# Altium PCB PCB2.PcbDoc (part 2 of 2)
Units mil, origin at the board's own origin, x right, y up, seen from the top; angles counter-clockwise.
Board outline 3937.01 x 3937.01 mil, 2 copper layers (Top Layer, Bottom Layer); 157 components, 107 nets, 472 pads, 34 vias.
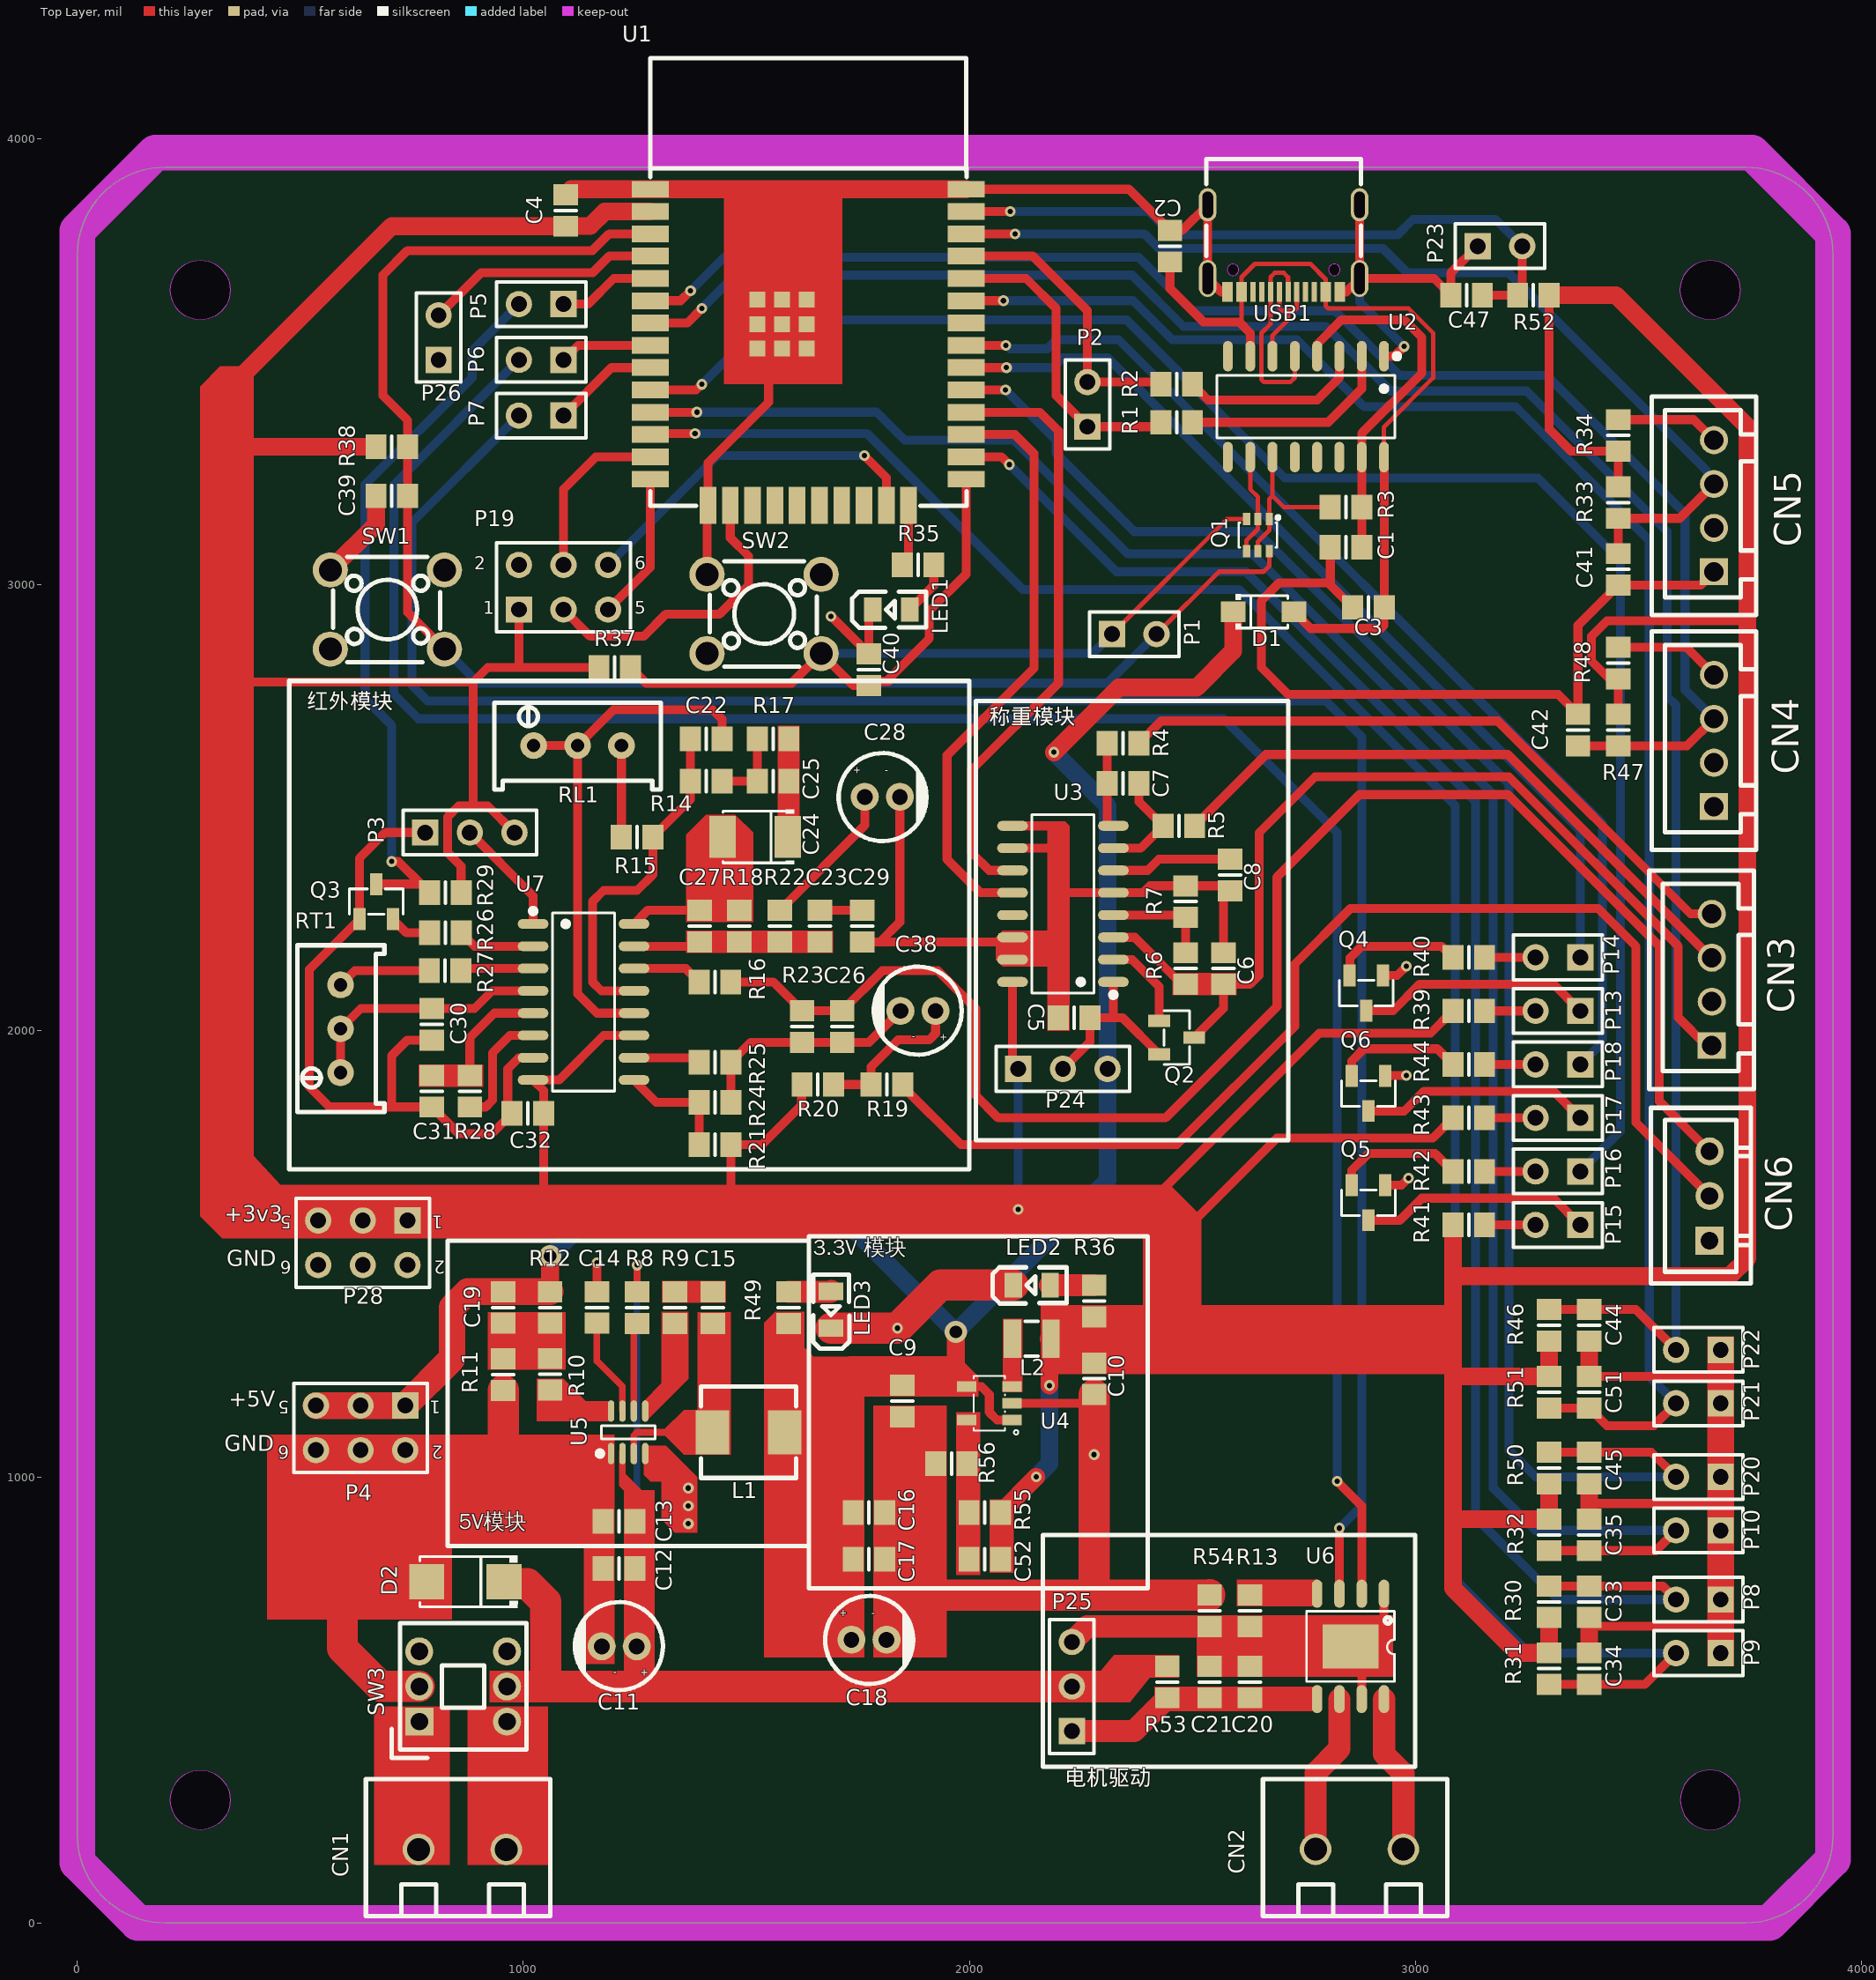
[diagram p0: Top Layer view]

## Via types
v1: diameter 24, hole 12, Top Layer to Bottom Layer, 32 vias
v2: diameter 50, hole 28, Top Layer to Bottom Layer, 2 vias

## Nets (pads, with @x,y where several pads share a name; then routed paths per layer and width w, separated by ;. In a path a pad name is that pad's centre, name@x,y a point inside that pad or via, vN(x,y) a via of type N, cw(c..) or ccw(c..) an arc to the next point about the centre after c; other vN are vias at no path point) (continued)
VBUS: C2.1 C3.1 D1.2 U2.7 U2.16 USB1.A4B9 USB1.B4A9 | length 1898.1
  Top Layer w10: 2605,3590 2610.51,3595.51 USB1.B4A9 2610.51,3690.51 2640,3720 2765,3720 2799.49,3685.51 USB1.A4B9 2799.49,3625.52 2805,3620 2985.36,3620 3040,3565.36 3040,3464.64 2930,3354.64 U2.16
  Top Layer w20: C2.1 2450,3665 2525,3590 2605,3590 2630,3565 U2.7 ; D1.2 2765.87,2902.44 2922.44,2902.44 2930,2910 C3.1@2930,2950 ; U2.16 2930.43,3286.48 C3.1
VCC: C14.2 U5.7 | length 220.6
  Top Layer w15: C14.2 1165,1260 1222.2,1202.8 U5.7
pads on no net: SW1.2 SW1.3 SW2.2 SW2.3 SW3.3 SW3.6 U1.17 U1.18 U1.19 U1.20 U1.21 U1.22 U1.32 U2.8 U2.9 U2.12 U2.13 U2.14 U3.13 USB1.A5 USB1.A8 USB1.B5 USB1.B8

## Polygon pours and split planes (outlines as drawn)
GND on Bottom Layer "GND_L02_P000" (solid, remove dead copper, pour order 0): 5,3940 15,3930 3945,3930 3945,10 3935,0 0,0

## Keep-outs
Keep-Out Layer:
  lines w80: 0,135 0,3795 175,3970 3755,3970 3937.01,3787.99 3937.01,142.01 3795,0 135,0 0,135

## Other copper
Top Layer:
  rectangle net GND: 1450,3450 1715,3890
  rectangle net E+: 2455,2080 2600,2130
  rectangle net +3V3: 2160,1230 3085,1385
  rectangle net GND: 3655,575 3715,1315
  rectangle net +3V3: 275,1585 395,3355
  rectangle net NetC24_1: 1570,2390 1620,2685
  rectangle net NetC23_1: 1365,2175 1695,2225
  rectangle net NetC31_1: 765,1875 910,1925
  rectangle net +5: 1540,595 1765,1270
  rectangle net +3V3: 325,1535 2430,1655
  rectangle net +3V3: 2045,785 2100,950
  rectangle net NetL2_1: 2075,1190 2120,1355
  rectangle net NetR13_1: 2600,710 2780,770
  rectangle net NetC20_1: 2415,475 2790,530
  rectangle net NetC20_2: 2510,552.05 2950,690
  rectangle net NetC52_2: 1970,780 2025,1145
  rectangle net GND: 1785,595 1950,1160
  rectangle net NetC15_2: 1310,1390 1455,1440
  rectangle net NetC15_1: 1390,1050 1465,1370
  rectangle net +12: 1225,495 1295,970
  rectangle net GND: 1135,580 1205,895
  rectangle net NetC19_1: 920,1240 1095,1370
  rectangle net GND: 425,680 840,860
  rectangle net GND: 425,845 1205,1095
  rectangle net NetCN1_2: 875,130 1055,485
  rectangle net NetCN1_1: 665,130 835,485
  region net GND: 2075,2225 2060,2210 2060,2160 2075,2145 2211.88,2145 2211.88,2225
  region net GND: 2175,2470 2215,2470 2225,2460 2225,2000 2175,2000
  region net +3V3: 395,3330 275,3330 275,3445 320,3490 395,3490
  region net +3V3: 275,1585 325,1535 335,1535 455,1655 395,1720
  region net NetC24_2: 1365,2245 1515,2245 1515,2445 1475,2485 1410,2485 1365,2440
  region net +3V3: 2390,1655 2450,1655 2520,1585 2520,1355 2390,1355
  region net NetC15_1: 1425,1050 1425,1150 1360,1150 1315,1105 1315,1095 1360,1050
  region net +12: 2295,565 2295,495 2360,495 2405,550.27 2470,550.27 2470,600 2325,600 2320,595
  region net +5: 1730,1270 1975,1270 2020,1225 2020,1180 1730,1180
  region net +5: 1540,1200 1540,1345 1565,1370 1630,1370 1630,1290 1660,1260 1660,1200
  region net GND: 1310,1070 1320,1070 1390,1000 1390,875 1340,875 1310,905
  region net GND: 1270,1070 1270,1005 1285,990 1320,990 1320,1070
  region net NetR9_1: 1310,1370 1370,1370 1370,1220 1275,1125 1270,1130 1270,1170 1310,1210
  region net NetR10_1: 1030,1220 1030,1125 1200,1125 1200,1170 1140,1170 1090,1220
  region net +12: 1215,1060 1215,980 1230,965 1270,965 1228.87,1006.13 1228.87,1060
  region net +12: 925,565 925,495 2310,495 2310,565

## Silkscreen, mask and mechanical layers (free items; w line width, h text height)
Top Overlay:
  lines w10: 475,1690 2000,1690 2000,2785 475,2785 475,1690 ; 830,845 1640,845 1640,1530 830,1530 830,845 ; 1640,750 2400,750 2400,1540 1640,1540 1640,750 ; 2015,1755 2715,1755 2715,2740 2015,2740 2015,1755 ; 2165,350 3000,350 3000,870 2165,870 2165,350
  text "红外模块" at 515,2711.07 h60
  text "称重模块" at 2045,2676.04 h60
  text "+3v3" at 330,1560.64 h60
  text "3.3V 模块" at 1650.04,1486.04 h60
  text "GND" at 335,1460.64 h60
  text "+5V" at 340,1145.64 h60
  text "GND" at 330,1045.64 h60
  text "5V模块" at 855.04,871.04 h60
  text "电机驱动" at 2215.04,296.23 h60
Mechanical 1:
  circle w10: c275.59,3661.42 r66.93
  circle w10: c275.59,275.59 r66.93
  circle w10: c3661.42,3661.42 r66.93
  circle w10: c3661.42,275.59 r66.93
  lines w10: 0,196.85 ccw(c196.85,196.85) 196.85,0 3740.16,0 ccw(c3740.16,196.85) 3937.01,196.85 3937.01,3740.16 ccw(c3740.16,3740.16) 3740.16,3937.01 196.85,3937.01 ccw(c196.85,3740.16) 0,3740.16 0,196.85

## Text inside footprints (layer, text, board x,y; h text height)
C11: Top Overlay "-" at 1209.32,572.21 h25.74 r180; Top Overlay "+" at 1280.63,572.46 h25.74 r180
C18: Top Overlay "+" at 1709.37,682.54 h25.74; Top Overlay "-" at 1780.68,682.79 h25.74
C28: Top Overlay "-" at 1810.68,2572.79 h25.74; Top Overlay "+" at 1739.37,2572.54 h25.74
C38: Top Overlay "+" at 1950.63,1997.46 h25.74 r180; Top Overlay "-" at 1879.32,1997.21 h25.74 r180
P4: Top Overlay "1" at 815,1180 h50 r180; Top Overlay "2" at 820,1080 h50 r180; Top Overlay "5" at 475,1180 h50 r180; Top Overlay "6" at 475,1080 h50 r180
P19: Top Overlay "6" at 1250,3025 h50; Top Overlay "5" at 1250,2925 h50; Top Overlay "2" at 890,3025 h50; Top Overlay "1" at 910,2925 h50
P28: Top Overlay "1" at 820,1595 h50 r180; Top Overlay "2" at 825,1495 h50 r180; Top Overlay "5" at 480,1595 h50 r180; Top Overlay "6" at 480,1495 h50 r180